# Altium PCB SuperCap-NEW-V2.0.PcbDoc (part 2 of 2)
Units mm, origin at the board's own origin, x right, y up, seen from the top; angles counter-clockwise.
Board outline 100.01 x 70.01 mm, 4 copper layers (Top Layer, POWER, GND, Bottom Layer), stack 0.603 mm thick; 124 components, 69 nets, 395 pads, 430 vias.
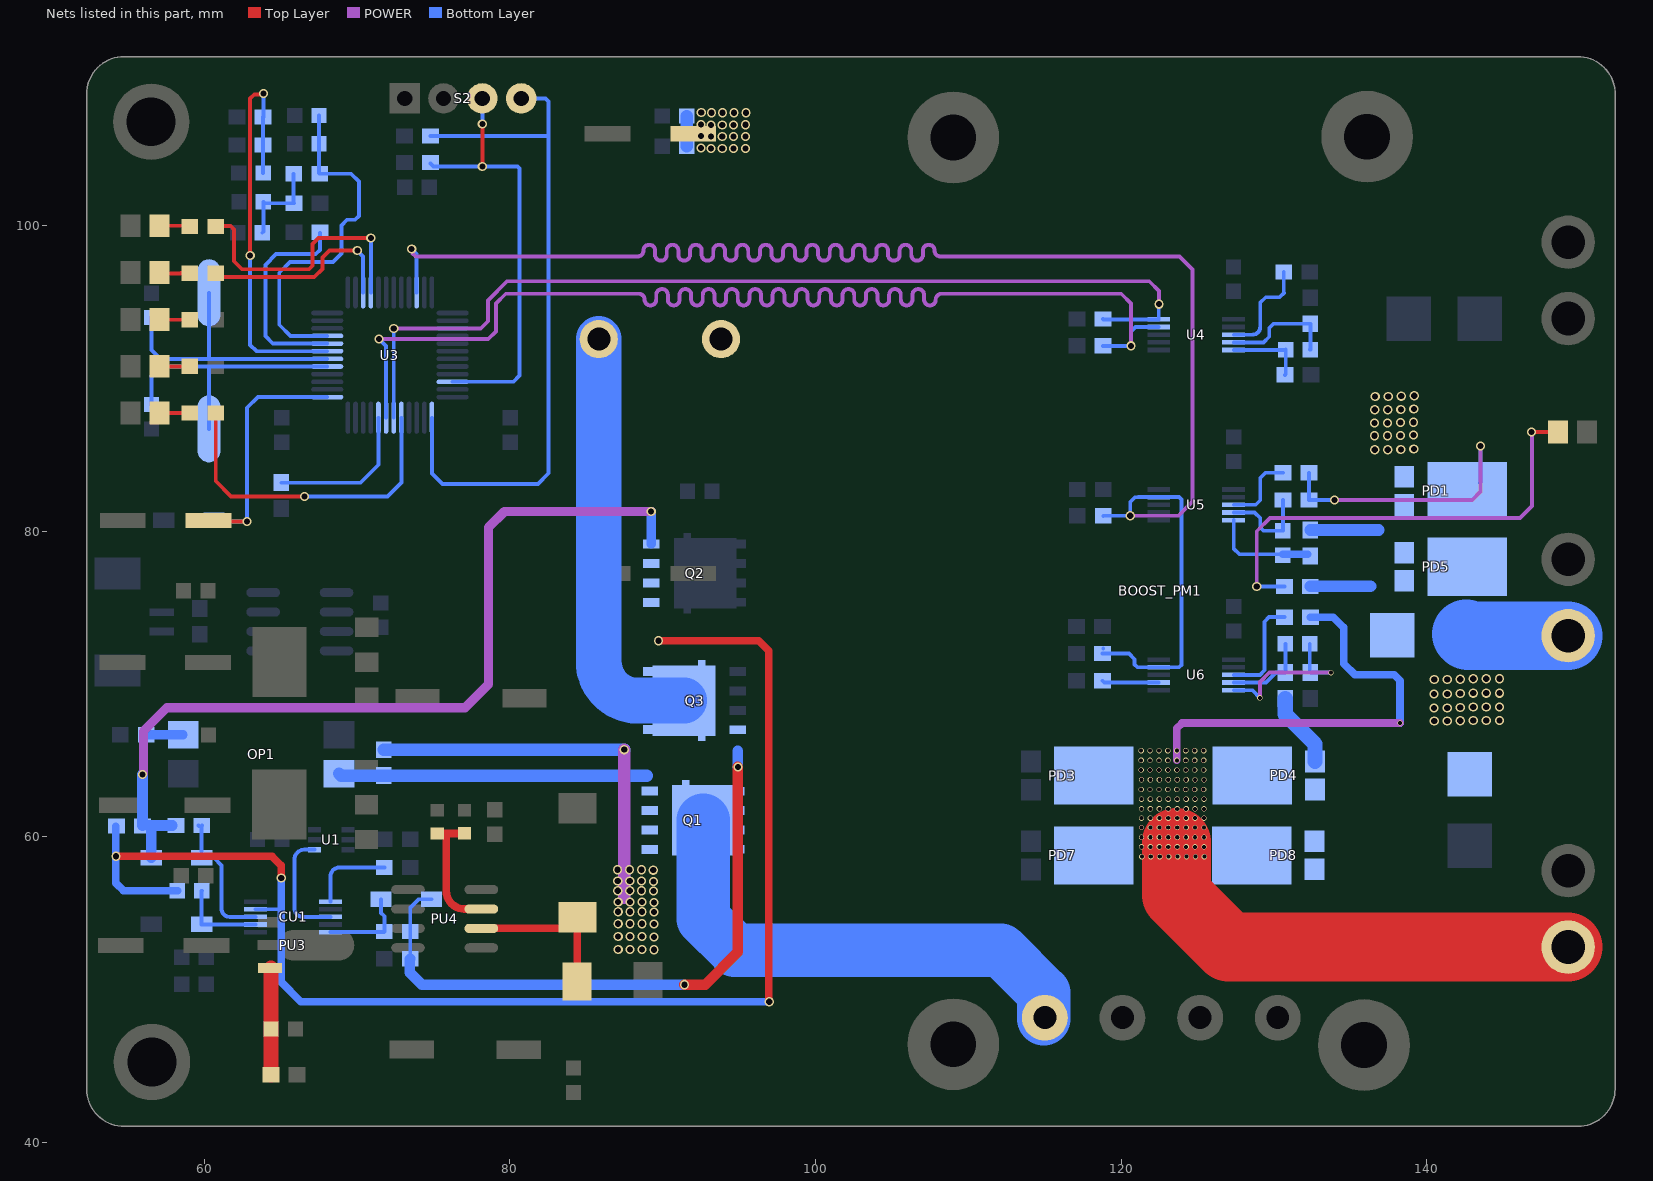
[diagram p4: the nets of this part, all layers, seen from the top]

## Via types
v1: diameter 0.6, hole 0.4, Top Layer to Bottom Layer, 223 vias
v2: diameter 0.35, hole 0.27, Top Layer to Bottom Layer, 202 vias
v3: diameter 0.559, hole 0.305, Top Layer to Bottom Layer, 5 vias

## Nets (pads, with @x,y where several pads share a name; then routed paths per layer and width w, separated by ;. In a path a pad name is that pad's centre, name@x,y a point inside that pad or via, vN(x,y) a via of type N, cw(c..) or ccw(c..) an arc to the next point about the centre after c; other vN are vias at no path point) (continued)
"IICI  SCL_BA": R25.2 U3.42 U4.5 | length 63.7
  POWER w0.254: v1(72.411,93.243) 78.105,93.243 78.588,93.726 78.588,95.098 79.832,96.342 121.844,96.342 122.479,95.707 v1(122.479,94.844)
  Bottom Layer w0.254: U3.42@72.411,87.416 v1(72.411,93.243) ; R25.2@118.809,93.872 118.833,93.847 U4.5@122.466,93.847 v1@122.466,94.793
"IICI  SDA": R26.2 R28.2 U3.22 U5.4 U6.4 | length 115.3
  POWER w0.254: v1(73.584,98.45) 73.65,98.384 73.65,98.172 73.854,97.968 88.24,97.968 88.367,97.968 ccw(c88.367,98.349) 88.748,98.349 88.748,98.353 cw(c89.129,98.353) 89.51,98.353 89.51,98.069 ccw(c89.891,98.069) 90.272,98.069 90.272,98.353 cw(c90.653,98.353) 91.034,98.353 91.034,98.069 ccw(c91.415,98.069) 91.796,98.069 91.796,98.353 cw(c92.177,98.353) 92.558,98.353 92.558,98.069 ccw(c92.939,98.069) 93.32,98.069 93.32,98.353 cw(c93.701,98.353) 94.082,98.353 94.082,98.069 ccw(c94.463,98.069) 94.844,98.069 94.844,98.353 cw(c95.225,98.353) 95.606,98.353 95.606,98.069 ccw(c95.987,98.069) 96.368,98.069 96.368,98.353 cw(c96.749,98.353) 97.13,98.353 97.13,98.069 ccw(c97.511,98.069) 97.892,98.069 97.892,98.353 cw(c98.273,98.353) 98.654,98.353 98.654,98.069 ccw(c99.035,98.069) 99.416,98.069 99.416,98.353 cw(c99.797,98.353) 100.178,98.353 100.178,98.069 ccw(c100.559,98.069) 100.94,98.069 100.94,98.353 cw(c101.321,98.353) 101.702,98.353 101.702,98.069 ccw(c102.083,98.069) 102.464,98.069 102.464,98.353 cw(c102.845,98.353) 103.226,98.353 103.226,98.069 ccw(c103.607,98.069) 103.988,98.069 103.988,98.353 cw(c104.369,98.353) 104.75,98.353 104.75,98.069 ccw(c105.131,98.069) 105.512,98.069 105.512,98.353 cw(c105.893,98.353) 106.274,98.353 106.274,98.069 ccw(c106.655,98.069) 107.036,98.069 107.036,98.353 cw(c107.417,98.353) 107.798,98.353 107.798,98.349 ccw(c108.179,98.349) 108.179,97.968 109.804,97.968 123.825,97.968 124.67,97.122 124.67,81.922 123.749,81.001 v1(120.599,81.001)
  Bottom Layer w0.254: v1(73.584,98.45) 73.911,98.123 U3.22@73.911,95.616 ; R28.2@118.783,71.983 120.507,71.983 120.879,71.612 120.879,71.272 121.063,71.088 U6.4@122.466,71.088 123.796,71.088 123.945,71.237 123.945,82.069 123.796,82.218 U5.4@122.466,82.218 121.137,82.218 ; R28.2@118.834,72.307 R28.2@118.834,72.313 ; R26.2@118.834,80.994 118.841,81.001 v1(120.599,81.001) 120.599,81.902 120.906,82.21 121.137,82.21
"IICI  SDA_BA": R24.2 U3.43 U4.4 | length 83.3
  POWER w0.254: v1(71.45,92.562) 78.592,92.562 79.096,93.066 79.096,94.887 79.738,95.529 87.553,95.529 88.442,95.529 cw(c88.442,95.148) 88.823,95.148 88.823,95.147 ccw(c89.204,95.147) 89.585,95.147 89.585,95.453 cw(c89.966,95.453) 90.347,95.453 90.347,95.147 ccw(c90.728,95.147) 91.109,95.147 91.109,95.453 cw(c91.49,95.453) 91.871,95.453 91.871,95.147 ccw(c92.252,95.147) 92.633,95.147 92.633,95.453 cw(c93.014,95.453) 93.395,95.453 93.395,95.147 ccw(c93.776,95.147) 94.157,95.147 94.157,95.453 cw(c94.538,95.453) 94.919,95.453 94.919,95.147 ccw(c95.3,95.147) 95.681,95.147 95.681,95.453 cw(c96.062,95.453) 96.443,95.453 96.443,95.147 ccw(c96.824,95.147) 97.205,95.147 97.205,95.453 cw(c97.586,95.453) 97.967,95.453 97.967,95.147 ccw(c98.348,95.147) 98.729,95.147 98.729,95.453 cw(c99.11,95.453) 99.491,95.453 99.491,95.147 ccw(c99.872,95.147) 100.253,95.147 100.253,95.453 cw(c100.634,95.453) 101.015,95.453 101.015,95.147 ccw(c101.396,95.147) 101.777,95.147 101.777,95.453 cw(c102.158,95.453) 102.539,95.453 102.539,95.147 ccw(c102.92,95.147) 103.301,95.147 103.301,95.453 cw(c103.682,95.453) 104.063,95.453 104.063,95.147 ccw(c104.444,95.147) 104.825,95.147 104.825,95.453 cw(c105.206,95.453) 105.587,95.453 105.587,95.147 ccw(c105.968,95.147) 106.349,95.147 106.349,95.453 cw(c106.73,95.453) 107.111,95.453 107.111,95.147 ccw(c107.492,95.147) 107.873,95.147 107.873,95.148 cw(c108.254,95.148) 108.254,95.529 109.595,95.529 120.015,95.529 120.65,94.894 v1@120.65,92.1
  Bottom Layer w0.254: v1(71.45,92.562) 71.911,92.101 U3.43@71.911,87.416 ; R24.2@118.809,92.119 v1(120.65,92.119) 120.65,93.066 120.932,93.348 U4.4@122.466,93.348
Moter: M1.1 PD3.2 PD4.2 PD7.2 PD8.2 R34.1 | length 59.1
  Top Layer w4.5: 123.622,59.639 123.622,56.185 127.024,52.782 M1.1@149.25,52.782
  POWER w0.5: v2(123.647,64.999) v2(123.647,65.634) 123.647,67.093 123.991,67.437 v2(138.252,67.437)
  Bottom Layer w0.5: R34.1@132.397,74.364 133.89,74.364 134.569,73.685 134.569,71.323 135.306,70.587 137.871,70.587 138.252,70.206 v2(138.252,67.437)
  other v2: 121.361,58.699 121.945,58.699 122.53,58.699 123.114,58.699 123.698,58.699 124.282,58.699 124.866,58.699 125.451,58.699 121.336,59.334 121.92,59.334 122.504,59.334 123.088,59.334 123.673,59.334 124.257,59.334 124.841,59.334 125.425,59.334 121.336,59.969 121.92,59.969 122.504,59.969 123.088,59.969 123.673,59.969 124.257,59.969 124.841,59.969 125.425,59.969 121.336,60.604 121.92,60.604 122.504,60.604 123.088,60.604 123.673,60.604 124.257,60.604 124.841,60.604 125.425,60.604 121.336,61.214 121.92,61.214 122.504,61.214 123.088,61.214 123.673,61.214 124.257,61.214 124.841,61.214 125.425,61.214 121.336,61.824 121.92,61.824 122.504,61.824 123.088,61.824 123.673,61.824 124.257,61.824 124.841,61.824 125.425,61.824 121.336,62.459 121.92,62.459 122.504,62.459 123.088,62.459 123.673,62.459 124.257,62.459 124.841,62.459 125.425,62.459 121.31,63.094 121.895,63.094 122.479,63.094 123.063,63.094 123.647,63.094 124.231,63.094 124.816,63.094 125.4,63.094 121.336,63.729 121.92,63.729 122.504,63.729 123.088,63.729 123.673,63.729 124.257,63.729 124.841,63.729 125.425,63.729 121.31,64.364 121.895,64.364 122.479,64.364 123.063,64.364 123.647,64.364 124.231,64.364 124.816,64.364 125.4,64.364 121.31,64.999 121.895,64.999 122.479,64.999 123.063,64.999 124.231,64.999 124.816,64.999 125.4,64.999 121.31,65.634 121.895,65.634 122.479,65.634 123.063,65.634 124.231,65.634 124.816,65.634 125.4,65.634
NetBOOST_PM1_1: BOOST_PM1.1 Q1.2 | length 32.4
  Bottom Layer w3.5: Q1.2@92.676,61.077 92.676,54.628 94.726,52.578 112.141,52.578 114.941,49.778 BOOST_PM1.1@114.941,48.076
NetC7_2: C7.2 PU3.3 RL1.2 | length 7
  Top Layer w1: RL1.2@64.377,44.425 PU3.3@64.377,51.408
NetC13_2: C13.2 C14.1 R3.2 R4.1 | length 6.1
  Bottom Layer w0.254: C14.1@63.805,99.517 63.881,99.593 C13.2@63.881,101.549 63.983,101.448 R3.2@65.889,101.448 65.864,101.473 R4.1@65.864,103.378
NetC19_2: C19.2 U3.6 Y1.1 | length 18.2
  Bottom Layer w0.254: C19.2@56.566,93.967 56.566,91.846 57.146,91.266 U3.6@68.061,91.266 ; 60.3,91.274 60.308,91.274 60.329,91.296 Y1.1@60.329,95.585
NetC20_2: C20.2 U3.5 Y1.2 | length 17.7
  Bottom Layer w0.254: C20.2@56.566,88.278 56.566,90.145 57.187,90.766 U3.5@68.061,90.766 ; Y1.2@60.321,86.685 60.321,90.754 60.325,90.758
NetC21_1: C21.1 D1.2 U3.1 | length 17.7
  Top Layer w0.254: C21.1@60.28,80.696 60.356,80.62 v1(62.814,80.62)
  Bottom Layer w0.254: D1.2@60.655,80.696 60.731,80.62 v1(62.814,80.62) 62.819,80.624 62.819,88.067 63.519,88.766 U3.1@68.061,88.766
NetC26_1: C26.1 CU1.2 D2.2 | length 5.7
  Bottom Layer w0.254: C26.1@59.855,56.464 59.842,56.464 D2.2@59.842,54.28 ccw(c59.868,54.28) 59.868,54.254 CU1.2@63.373,54.254
NetC26_2: C26.2 CU1.4 L7.1 Q2.3 Q3.2 R19.2 | length 119.4
  Top Layer w0.254: v1(65.049,57.302) v1@65.054,57.307 ; v1@96.952,49.225 v1(96.977,49.2)
  Top Layer w0.508: v1(54.229,58.725) 64.44,58.725 65.054,58.11 v1@65.054,57.307 ; v1(89.738,72.822) 96.291,72.822 96.952,72.161 v1@96.952,49.225
  Bottom Layer w0.254: R19.2@54.229,60.667 R19.2@54.268,60.706 ; CU1.4@63.373,55.254 65.049,55.254 ; v1@96.969,49.208 v1(96.977,49.2)
  Bottom Layer w0.508: R19.2@54.229,60.667 54.229,56.972 54.737,56.464 C26.2@58.255,56.464 ; v1(65.049,57.302) 65.049,55.254 65.049,50.495 66.337,49.208 v1@96.969,49.208
  Bottom Layer w3: L7.1@85.828,92.558 85.828,71.445 ccw(c88.368,71.445) 88.368,68.905 Q3.2@91.398,68.905
NetC33_1: C33.1 R30.1 U4.10 | length 5.1
  Bottom Layer w0.254: U4.10@127.368,91.847 C33.1@130.772,91.847 ; R30.1@130.722,90.221 130.772,90.271 C33.1@130.772,91.847 ; C33.1@130.772,91.872 C33.1@130.772,91.847
NetC33_2: C33.2 R38.1 U4.9 | length 7.6
  Bottom Layer w0.254: U4.9@127.368,92.348 129.33,92.348 129.692,92.71 129.692,93.287 129.967,93.562 R38.1@132.385,93.562 132.385,91.885 C33.2@132.372,91.872
NetC34_1: C34.1 R33.1 U5.10 | length 6.9
  Bottom Layer w0.254: U5.10@127.368,80.718 127.368,78.854 127.743,78.479 C34.1@130.581,78.479
  Bottom Layer w0.508: C34.1@130.581,78.479 R33.1@132.207,78.479
NetC34_2: C34.2 R39.1 U5.9 | length 6.1
  Bottom Layer w0.254: U5.9@127.368,81.218 128.739,81.218 129.108,80.848 129.108,80.239 129.324,80.023 C34.2@130.581,80.023 ; C34.2@130.596,80.023 R39.1@130.596,82.035
NetC35_1: C35.1 R35.1 U6.10 | length 11.1
  POWER w0.254: v2(129.083,69.088) 129.083,70.129 129.692,70.739 v2(133.731,70.739)
  Bottom Layer w0.254: U6.10@127.368,69.588 128.583,69.588 v2(129.083,69.088) ; C35.1@132.347,72.619 132.347,70.789 R35.1@132.385,70.751 132.397,70.739 v2(133.731,70.739)
NetC35_2: C35.2 R40.1 U6.9 | length 5.5
  Bottom Layer w0.254: U6.9@127.368,70.088 129.473,70.088 130.136,70.751 R40.1@130.734,70.751 130.747,70.764 C35.2@130.747,72.619
NetCR1_1: CR1.1 R14.2 R15.2 U3.7 | length 27.6
  Top Layer w0.254: v1(63.017,98.019) 63.005,98.031 63.005,108.293 63.281,108.57 63.815,108.57 v1(63.881,108.636)
  Bottom Layer w0.254: v1(63.017,98.019) 63.017,92.177 63.42,91.774 63.428,91.774 ; 63.428,91.766 U3.7@68.061,91.766 ; CR1.1@63.868,103.429 63.868,105.258 63.868,107.086 63.881,107.099 v1(63.881,108.636)
NetCU1_3: CU1.3 D3.2 R18.1 | length 9
  Bottom Layer w0.254: R18.1@59.626,60.731 R18.1@59.665,60.692 ; R18.1@59.854,60.731 59.842,60.72 D3.2@59.842,58.623 60.641,58.623 61.138,58.127 61.138,55.296 ccw(c61.679,55.296) 61.679,54.754 CU1.3@63.373,54.754
NetCU1_6: CU1.6 R22.1 | length 5.5
  Bottom Layer w0.254: CU1.6@68.275,55.754 68.275,57.404 cw(c68.859,57.404) 68.859,57.988 R22.1@71.795,57.988
NetCU1_10: CU1.10 D4.2 R21.1 | length 5.7
  Bottom Layer w0.254: CU1.10@68.275,53.754 71.752,53.754 ccw(c71.752,53.797) R21.1@71.795,53.797 71.795,54.799 71.577,55.016 D4.2@71.577,55.905
NetD3_1: D3.1 Q2.1 R18.2 R19.1 | length 57.3
  POWER w0.6: v1(55.968,64.072) 56.032,64.137 56.032,66.904 57.569,68.44 77.076,68.44 78.613,69.977 78.613,80.239 79.654,81.28 v1(89.256,81.28)
  Bottom Layer w0.6: Q2.1@89.256,79.146 v1(89.256,81.28)
  Bottom Layer w0.7: R19.1@55.968,60.731 v1(55.968,64.072) ; D3.1@56.54,58.623 56.54,60.554 56.363,60.731 R18.2@57.926,60.731
NetD4_1: D4.1 Q3.1 R21.2 R23.1 | length 41.7
  Top Layer w0.7: v1(91.44,50.317) 92.79,50.317 94.927,52.455 v1(94.927,64.559)
  Bottom Layer w0.254: R23.1@73.495,52.019 R21.2@73.495,53.797 73.495,55.359 74.041,55.905 D4.1@74.879,55.905
  Bottom Layer w0.7: R23.1@73.495,52.019 73.457,51.981 73.457,51.117 74.256,50.317 v1(91.44,50.317) ; v1(94.927,64.559) 94.927,65.608
NetL1_1: L1.1 PU4.2 SS1.2 | length 10.8
  Top Layer w0.5: PU4.2@78.143,54 83.693,54 L1.1@84.411,54.719 ; SS1.2@84.411,50.535 L1.1@84.411,54.719 ; L1.1@84.43,54.737 L1.1@84.411,54.719
NetL2_1: L2.1 R6.2 | length 2
  Top Layer w0.254: L2.1@57.094,99.974 59.018,99.974 R6.2@59.069,99.924
NetL3_1: L3.1 R7.1 | length 2.1
  Top Layer w0.254: L3.1@57.094,96.911 57.155,96.85 58.471,96.85 58.495,96.874 R7.1@59.069,96.874
  Top Layer w0.6: R7.1@59.032,96.911 R7.1@59.069,96.874
NetL4_1: L4.1 R9.1 | length 2
  Top Layer w0.254: L4.1@57.094,93.847 57.116,93.824 R9.1@59.069,93.824
NetL5_1: L5.1 R10.1 | length 2
  Top Layer w0.254: L5.1@57.094,90.783 57.102,90.775 R10.1@59.069,90.775
NetL6_1: L6.1 R11.1 | length 2
  Top Layer w0.254: L6.1@57.094,87.719 59.062,87.719 R11.1@59.069,87.725
NetLED1_1: LED1.1 R20.1 | length 30.7
  Top Layer w0.254: v1(146.863,86.487) LED1.1@148.595,86.487
  POWER w0.254: v1(128.88,76.378) 128.88,79.985 129.743,80.848 146.101,80.848 146.888,81.636 146.888,86.462 v1(146.863,86.487)
  Bottom Layer w0.254: v1(128.88,76.378) R20.1@130.683,76.378
NetOP1_2: OP1.2 R17.1 | length 2.4
  Bottom Layer w0.6: R17.1@56.222,66.675 OP1.2@58.629,66.675
NetOP1_4: OP1.4 Q1.1 RPL1.2 | length 20.2
  Bottom Layer w0.8: OP1.4@68.829,64.135 68.967,63.996 88.97,63.996
NetPU4_3: PU4.3 R1.1 R2.2 | length 8.5
  Top Layer w0.5: R1.1@75.26,60.216 75.844,60.216 ; R2.2@77.047,60.219 77.047,60.216 75.844,60.216 ; PU4.3@78.143,55.27 77.038,55.27 cw(c77.038,56.464) 75.844,56.464 75.844,60.216
NetR16_1: R16.1 U3.44 | length 9.9
  Bottom Layer w0.254: R16.1@65.049,83.16 70.231,83.16 71.411,84.34 U3.44@71.411,87.416
NetR36_1: R36.1 U6.2 | length 3.7
  Bottom Layer w0.254: R36.1@118.782,70.206 118.9,70.088 U6.2@122.466,70.088
O_LED: R7.2 U3.15 | length 13.4
  Top Layer w0.254: R7.2@60.769,96.874 61.021,96.622 67.208,96.622 67.742,97.155 67.742,97.892 68.199,98.349 v1(70.028,98.349)
  Bottom Layer w0.254: v1(70.028,98.349) 70.411,97.965 U3.15@70.411,95.616
Power_Cap: Cap1.1 PD1.2 PD5.2 Q1.3 R31.1 R39.2 RPL1.1 RT2.2 | length 50.8
  POWER w0.254: v1@133.953,82.042 v1(133.96,82.042) 142.977,82.042 143.51,82.575 v1(143.51,85.573)
  POWER w0.8: 87.489,56.007 87.489,57.836 v1(87.489,65.696)
  Bottom Layer w0.254: R31.1@132.296,83.813 R39.2@132.296,82.035 133.953,82.035 v1(133.96,82.042) ; PD1.2@143.478,83.153 143.51,83.185 v1(143.51,85.573)
  Bottom Layer w0.8: RPL1.1@71.755,65.696 v1(87.489,65.696) v1@87.503,65.71
  Bottom Layer w4.5: RT2.2@142.586,73.272 142.706,73.152 Cap1.1@149.25,73.152
  other v1: 89.433,52.603 87.097,52.629 87.876,52.629 88.654,52.629 89.433,53.442 87.097,53.467 87.876,53.467 88.654,53.467 89.433,54.28 87.097,54.305 87.876,54.305 88.654,54.305 89.433,55.067 87.097,55.093 87.876,55.093 88.646,55.093 89.433,55.702 87.097,55.728 87.876,55.728 88.654,55.728 89.408,56.439 87.071,56.464 87.85,56.464 88.621,56.464 89.408,57.074 87.071,57.099 87.85,57.099 88.629,57.099 89.391,57.81 87.054,57.836 87.833,57.836 88.612,57.836 140.487,67.564 141.338,67.564 142.189,67.589 143.04,67.615 143.891,67.615 144.755,67.615 140.466,68.421 141.338,68.428 142.189,68.453 143.04,68.478 143.891,68.478 144.755,68.478 140.466,69.335 141.338,69.342 142.189,69.367 143.04,69.393 143.891,69.393 144.755,69.393 140.487,70.282 141.338,70.282 142.189,70.307 143.04,70.333 143.891,70.333 144.755,70.333
Power_Charge: C27.1 C28.1 C29.1 L7.2 PD1.1 PD5.1 R20.2 R33.2 RT2.1 | length 10.4
  Bottom Layer w0.762: R20.2@132.383,76.378 136.322,76.378 ; R33.2@132.385,80.073 136.869,80.073
  Bottom Layer w0.8: C28.1@91.58,105.181 C29.1@91.58,107.163
  other v1: 136.601,85.319 137.452,85.319 138.303,85.344 139.154,85.369 136.576,86.233 137.427,86.233 138.278,86.258 139.129,86.284 136.576,87.071 137.427,87.071 138.278,87.097 139.129,87.122 136.601,87.935 137.452,87.935 138.303,87.96 139.154,87.986 136.627,88.798 137.477,88.798 138.328,88.824 139.179,88.849 93.167,105.029 93.904,105.029 94.64,105.029 95.428,105.029 92.507,105.054 93.167,105.816 93.904,105.816 94.64,105.816 95.428,105.808 92.507,105.842 93.167,106.578 93.904,106.578 94.64,106.578 95.428,106.587 92.507,106.604 93.193,107.366 93.929,107.366 94.666,107.366 95.453,107.366 92.532,107.391
PWM: CU1.8 U1.4 | length 7.5
  Bottom Layer w0.254: U1.4@67.221,59.157 66.574,59.157 ccw(c66.574,58.496) 65.913,58.496 65.913,55.321 ccw(c66.48,55.321) 66.48,54.754 CU1.8@68.275,54.754
PWM_LED: R11.2 U3.41 | length 21.6
  Top Layer w0.254: R11.2@60.769,87.725 60.769,83.275 61.773,82.271 v1(66.573,82.271)
  Bottom Layer w0.254: v1(66.573,82.271) 72.009,82.271 72.911,83.173 U3.41@72.911,87.416
R_LED: R6.1 U3.16 | length 17.8
  Top Layer w0.254: R6.1@60.769,99.924 60.794,99.949 61.747,99.949 61.963,99.733 61.963,97.65 62.484,97.13 66.878,97.13 67.107,97.358 67.107,98.781 67.493,99.167 v1(70.911,99.167)
  Bottom Layer w0.254: U3.16@70.911,95.616 v1(70.911,99.167)
SUPERCAP_OUT: PD4.1 PD8.1 R40.2 RT3.2 | length 4.9
  Bottom Layer w1: R40.2@130.734,69.051 130.734,68.021 132.682,66.073 PD4.1@132.682,64.928
SWCLK: R13.2 S2.4 U3.37 | length 45.8
  Bottom Layer w0.254: R13.2@74.815,105.842 82.54,105.842 ; U3.37@74.911,87.416 74.911,83.762 75.59,83.083 81.839,83.083 82.54,83.785 82.54,105.842 ; S2.4@80.747,108.306 82.347,108.306 82.54,108.112 82.54,105.842
SWDIO: R12.2 S2.3 U3.34 | length 28.5
  Top Layer w0.254: v1(78.207,103.861) v1(78.207,106.629)
  Bottom Layer w0.254: R12.2@74.828,104.038 75.006,103.861 v1(78.207,103.861) 80.496,103.861 80.645,103.712 80.645,90.17 80.241,89.766 U3.34@76.261,89.766 ; v1(78.207,106.629) S2.3@78.207,108.306
VB_TP: R34.2 U6.8 | length 6.8
  Bottom Layer w0.254: U6.8@127.368,70.588 129.084,70.588 129.388,70.891 129.388,74.066 129.686,74.364 R34.2@130.697,74.364
VBUS_TP: R32.2 U4.8 | length 6.8
  Bottom Layer w0.254: U4.8@127.368,92.847 128.585,92.847 ccw(c128.585,93.37) 129.108,93.37 129.108,94.945 129.464,95.301 130.378,95.301 130.658,95.58 130.646,95.592 R32.2@130.646,96.952
VCAP_TP: R31.2 U5.8 | length 5
  Bottom Layer w0.254: U5.8@127.368,81.718 128.809,81.718 129.108,82.017 129.108,83.483 129.438,83.813 R31.2@130.596,83.813
VDDA: C15.1 C16.1 R4.2 U3.9 | length 23.5
  Bottom Layer w0.254: C16.1@67.526,107.188 C15.1@67.526,105.334 67.526,103.416 R4.2@67.564,103.378 69.621,103.378 70.129,102.87 70.129,100.609 69.888,100.368 69.355,100.368 68.986,100 68.986,98.171 68.428,97.612 65.634,97.612 64.922,96.901 64.922,93.497 65.654,92.766 U3.9@68.061,92.766
VSSA: R5.1 U3.8 | length 14
  Bottom Layer w0.254: 64.503,92.266 U3.8@68.061,92.266 ; 64.503,92.274 64.495,92.274 64.008,92.761 64.008,97.409 64.719,98.12 67.31,98.12 67.589,98.4 R5.1@67.589,99.492
pads on no net: CU1.5 PU1. PU2. S1.0 U2.5 U3.2 U3.3 U3.4 U3.10 U3.11 U3.12 U3.17 U3.18 U3.19 U3.20 U3.25 U3.26 U3.27 U3.28 U3.29 U3.30 U3.31 U3.32 U3.33 U4.3 U5.3 U6.3

## Polygon pours and split planes (outlines as drawn)
GND on Top Layer "GND_L01_P000" (solid, remove dead copper, pour order 0): 52.248,111.125 152.349,111.125 152.451,111.023 152.451,40.919 52.349,40.919 52.299,40.869
no net on GND "NONET_L03_P003" (solid, remove dead copper, pour order 3): 52.222,111.252 152.324,111.252 152.425,111.15 152.425,41.046 52.324,41.046 52.273,40.996
GND on GND "GND_L03_P004" (solid, remove dead copper, pour order 4): 52.222,111.252 52.299,111.176 52.299,41.021 152.4,41.021 152.425,41.046 152.375,41.097 152.375,111.201
no net on POWER "NONET_L02_P002" (solid, remove dead copper, pour order 2): 52.222,111.227 152.324,111.227 152.425,111.125 152.425,41.021 52.324,41.021 52.273,40.97
GND on POWER "GND_L02_P005" (solid, remove dead copper, pour order 5): 52.222,111.227 152.324,111.227 152.425,111.125 152.425,41.021 52.324,41.021 52.273,40.97
GND on Bottom Layer "GND_L04_P001" (solid, remove dead copper, pour order 1): 52.248,111.277 152.349,111.277 152.451,111.176 152.451,41.072 52.349,41.072 52.299,41.021

## Keep-outs
Keep-Out Layer:
  lines w0.254: 52.32,43.483 ccw(c54.771,43.496) 54.784,41.045 ; 52.324,43.485 52.324,108.56 ; 52.324,108.585 cw(c54.775,108.598) 54.762,111.049 ; 54.764,41.045 149.884,41.045 ; 54.812,111.047 149.912,111.047 ; 149.864,111.047 cw(c149.877,108.596) 152.328,108.609 ; 149.886,41.041 ccw(c149.873,43.492) 152.324,43.505 ; 152.324,43.485 152.324,108.636

## Other copper
Top Layer:
  rectangle net Battery_out: 100.686,62.636 104.191,64.287
  rectangle net Moter: 120.879,55.372 125.857,58.369
  rectangle net Moter: 120.879,58.293 125.882,65.938
  rectangle net Power_Charge: 92.151,86.665 95.656,107.696
  rectangle net Power_Charge: 93.98,84.861 139.319,89.281
  rectangle net Battery_out: 77.064,51.918 79.223,53.035
  rectangle net Power_Charge: 91.11,104.699 95.682,107.671
  rectangle net 12V: 56.032,49.784 59.03,51.867
  rectangle net Battery_out: 90.703,74.676 95.631,79.578
  region net Power_Charge: 95.578,90.041 ccw(c96.442,90.041) 96.442,89.178 95.578,89.178
  region net Power_Charge: 92.151,87.37 92.151,86.343 ccw(c93.794,86.506) 93.938,84.861 94.632,84.861 94.632,87.319 ccw(c94.581,87.319) 94.581,87.37
  region net Moter: 120.879,55.677 120.879,51.664 121.996,50.546 127.229,50.546 127.229,55.626
  region net 12V: 58.776,53.213 57.81,52.248 56.413,52.248 56.032,51.867 58.75,51.867
  pour cut-out: 104.013,110.998 139.979,110.998 139.979,40.996 103.962,40.996
POWER:
  rectangle net Power_Cap: 86.741,52.146 141.3,57.734
  rectangle net Power_Cap: 140.03,57.785 145.186,70.993
  region net Power_Cap: 145.186,57.874 145.186,54.686 cw(c142.646,54.686) 142.646,52.146 140.056,52.146 140.056,57.874
  region net Power_Cap: 140.116,59.674 cw(c138.059,59.674) 138.059,57.617 140.116,57.617
Bottom Layer:
  rectangle net Boost_OUT: 141.072,57.633 144.577,61.011
  rectangle net Boost_OUT: 129.134,50.546 143.993,55.677
  rectangle net SUPERCAP_OUT: 131.953,62.484 144.348,65.71
  rectangle net SUPERCAP_OUT: 131.953,57.125 139.522,65.71
  rectangle net Moter: 115.672,56.871 131.14,65.938
  rectangle net Battery_out: 100.686,60.909 107.264,65.684
  rectangle net NetD4_1: 94.564,64.559 95.275,67.285
  rectangle net Battery_out: 105.689,57.175 114.757,65.684
  rectangle net Power_Charge: 91.135,104.673 95.707,107.671
  rectangle net NetOP1_4: 88.57,62.662 89.713,64.389
  rectangle net 3.3V: 126.644,93.675 128.118,94.056
  rectangle net Power_Cap: 86.741,52.146 89.764,61.062
  rectangle net Power_Charge: 136.195,81.559 139.294,89.256
  rectangle net NetC26_2: 86.995,69.952 89.256,78.257
  rectangle net 12V: 56.007,49.784 59.055,52.629
  rectangle net 12V: 62.865,52.73 63.881,53.823
  rectangle net NetC26_2: 88.671,66.599 89.891,78.257
  rectangle net Battery_out: 90.754,74.219 103.734,79.578
  rectangle net Power_Charge: 136.195,71.545 139.217,84.626
  rectangle net Power_Cap: 139.979,67.132 145.263,84.582
  region net SUPERCAP_OUT: 142.154,62.586 ccw(c142.154,60.157) 139.725,60.157 139.725,62.586
  region net Boost_OUT: 138.795,55.448 ccw(c138.795,57.877) 141.224,57.877 141.224,55.448
  region net Battery_out: 105.841,58.651 ccw(c103.412,58.651) 103.412,61.08 105.841,61.08
  region net Battery_out: 101.019,80.666 101.019,72.979 ccw(c99.672,72.979) 99.672,74.325 97.64,74.325 97.64,79.426 99.505,79.426 ccw(c99.505,80.969)
  region net Power_Cap: 86.741,61.062 87.169,62.078 89.764,62.078 89.764,61.062
  region net Boost_OUT: 143.993,50.546 144.577,51.13 144.577,54.864 144.069,54.864 143.993,54.864
  region net SUPERCAP_OUT: 139.522,57.125 140.03,57.633 140.03,62.865 139.573,62.865 139.192,62.865 139.192,57.125
  region net Boost_OUT: 129.134,55.677 128.448,54.991 128.448,50.317 129.134,50.317 129.159,50.292
  pour cut-out: 114.998,98.285 114.998,66.497 134.226,66.497 134.226,98.311
  region net 12V: 56.007,52.299 56.007,53.442 56.261,53.442 56.261,52.299
  region net NetC26_2: 86.995,79.299 88.367,77.927 88.367,77.749 87.02,77.749 86.995,77.724

## Silkscreen, mask and mechanical layers (free items; w line width, h text height)
Top Overlay:
  drawing of 3082 lines, arcs and shapes, not listed
  text "V  G  D  C" at 73.812,105.385 h1.52
  text "电源" at 150.036,102.718 h3 r90
  text "L1" at 150.292,82.931 h3 r90
  text "超电" at 150.293,64.084 h3 r90
  text "底盘" at 150.304,43.256 h3 r90
  text "IN   G    G  OUT" at 112.852,42.858 h3
Bottom Overlay:
  text "R14\R15二选一" at 68.478,108.948 h1.25
  text "H" at 56.744,76.124 h1.52 r270
  text "L" at 56.896,72.771 h1.52 r270
Top Solder:
  rectangle: 121.361,51.918 125.451,65.888
  rectangle: 122.733,50.902 149.327,54.661
  rectangle: 92.38,86.411 95.377,107.594
  rectangle: 94.107,85.395 139.129,88.849
  region: 125.374,55.931 126.746,54.559 125.374,54.559
  region: 121.361,51.918 122.377,50.902 122.987,50.902 122.987,51.918
  region: 95.326,89.332 95.885,88.773 95.326,88.773
  region: 92.38,86.589 92.38,86.338 93.37,85.395 94.59,85.395 94.59,86.589
Bottom Solder:
  rectangle: 113.665,48.158 116.205,50.495
  rectangle: 94.183,51.283 112.192,53.924
  rectangle: 128.803,48.133 131.699,54.458
  rectangle: 129.515,51.079 143.535,55.042
  rectangle: 141.58,51.486 144.12,60.35
  rectangle: 139.268,62.738 142.596,65.329
  rectangle: 132.131,57.379 139.446,65.329
  rectangle: 143.281,92.354 149.25,95.453
  rectangle: 142.469,71.628 149.301,74.727
  rectangle: 91.44,53.924 94.183,59.182
  region: 111.575,51.289 113.69,49.174 115.621,49.174 115.621,50.495 112.192,53.924
  region: 116.205,50.495 112.776,53.924 112.192,53.924 115.621,50.495
  region: 94.183,55.118 95.377,53.924 94.183,53.924
  region: 91.44,53.924 94.082,51.283 94.183,51.283 94.183,53.924
  region: 144.12,51.486 143.713,51.079 143.535,51.079 143.535,51.486
  region: 129.515,55.042 128.803,54.458 129.515,54.458
  region: 139.446,57.379 139.7,57.633 139.7,61.925 139.421,61.925
  region: 140.805,62.763 139.408,62.763 139.408,61.544